# Altium PCB TestBoard.PcbDoc (part 1 of 3)
Units mm, origin at the board's own origin, x right, y up, seen from the top; angles counter-clockwise.
Board outline 300 x 186 mm, 4 copper layers (Top Layer, Mid-Layer 2, Mid-Layer 1, Bottom Layer); 136 components, 264 nets, 1109 pads, 450 vias.
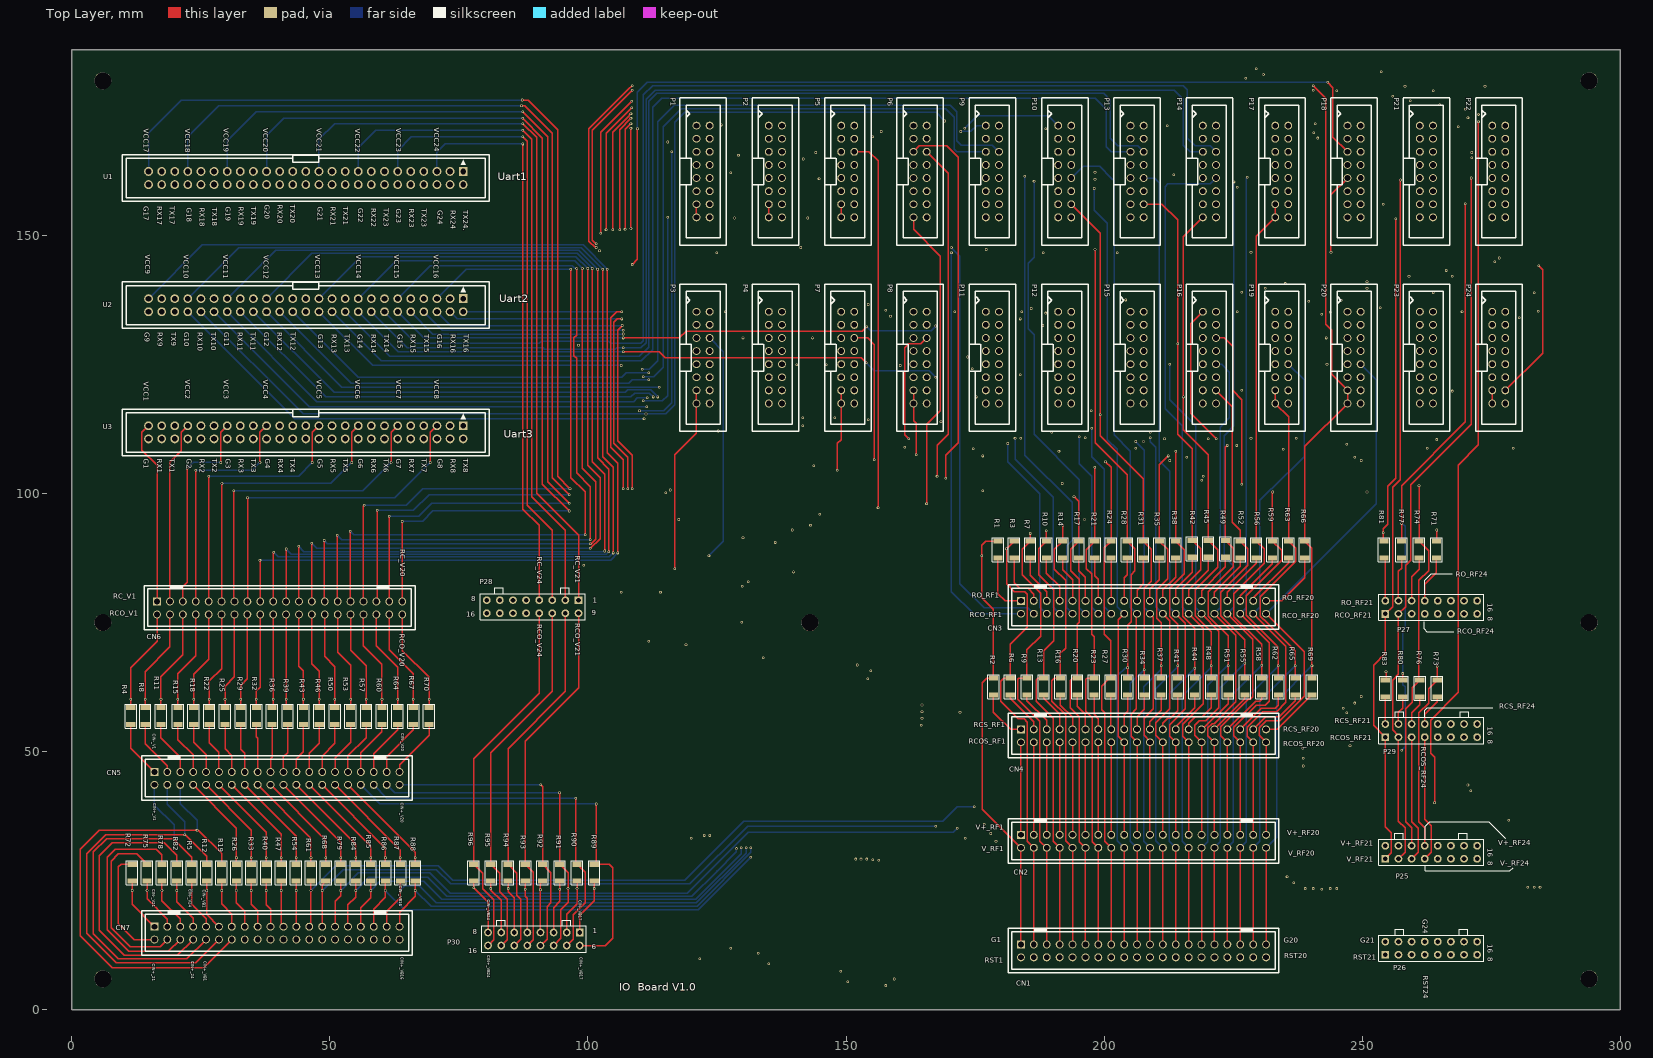
[diagram p0: Top Layer view]
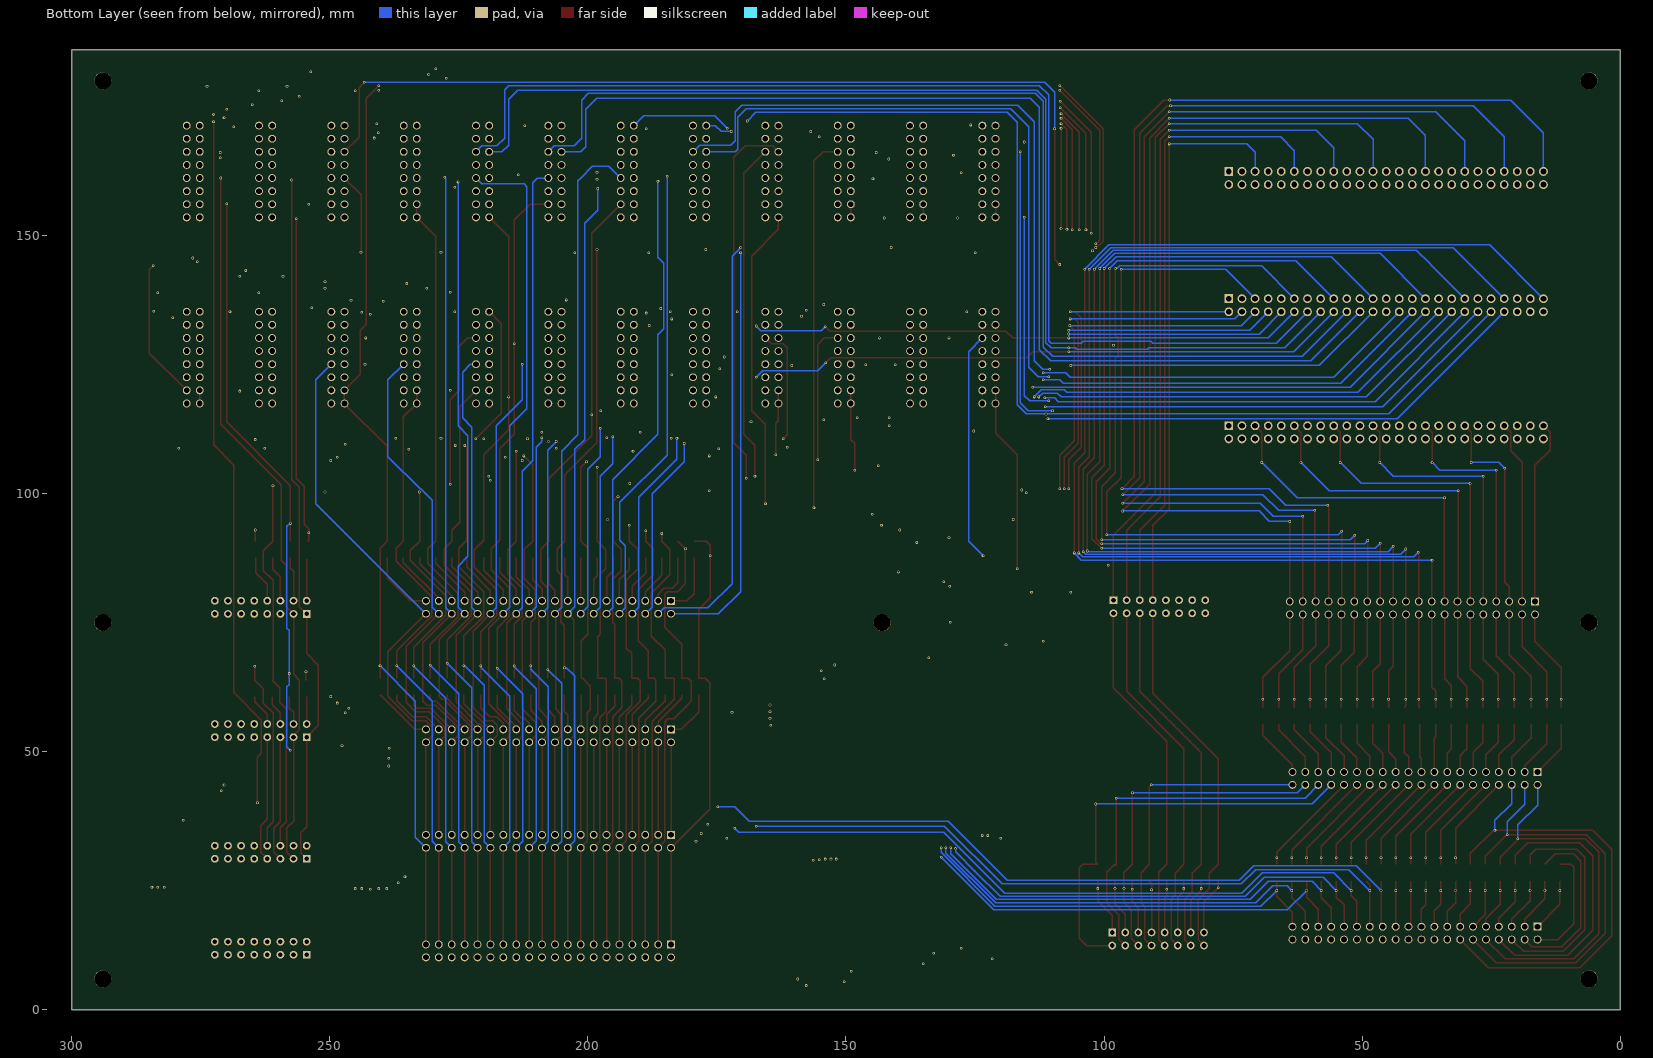
[diagram p1: Bottom Layer view, seen from below]
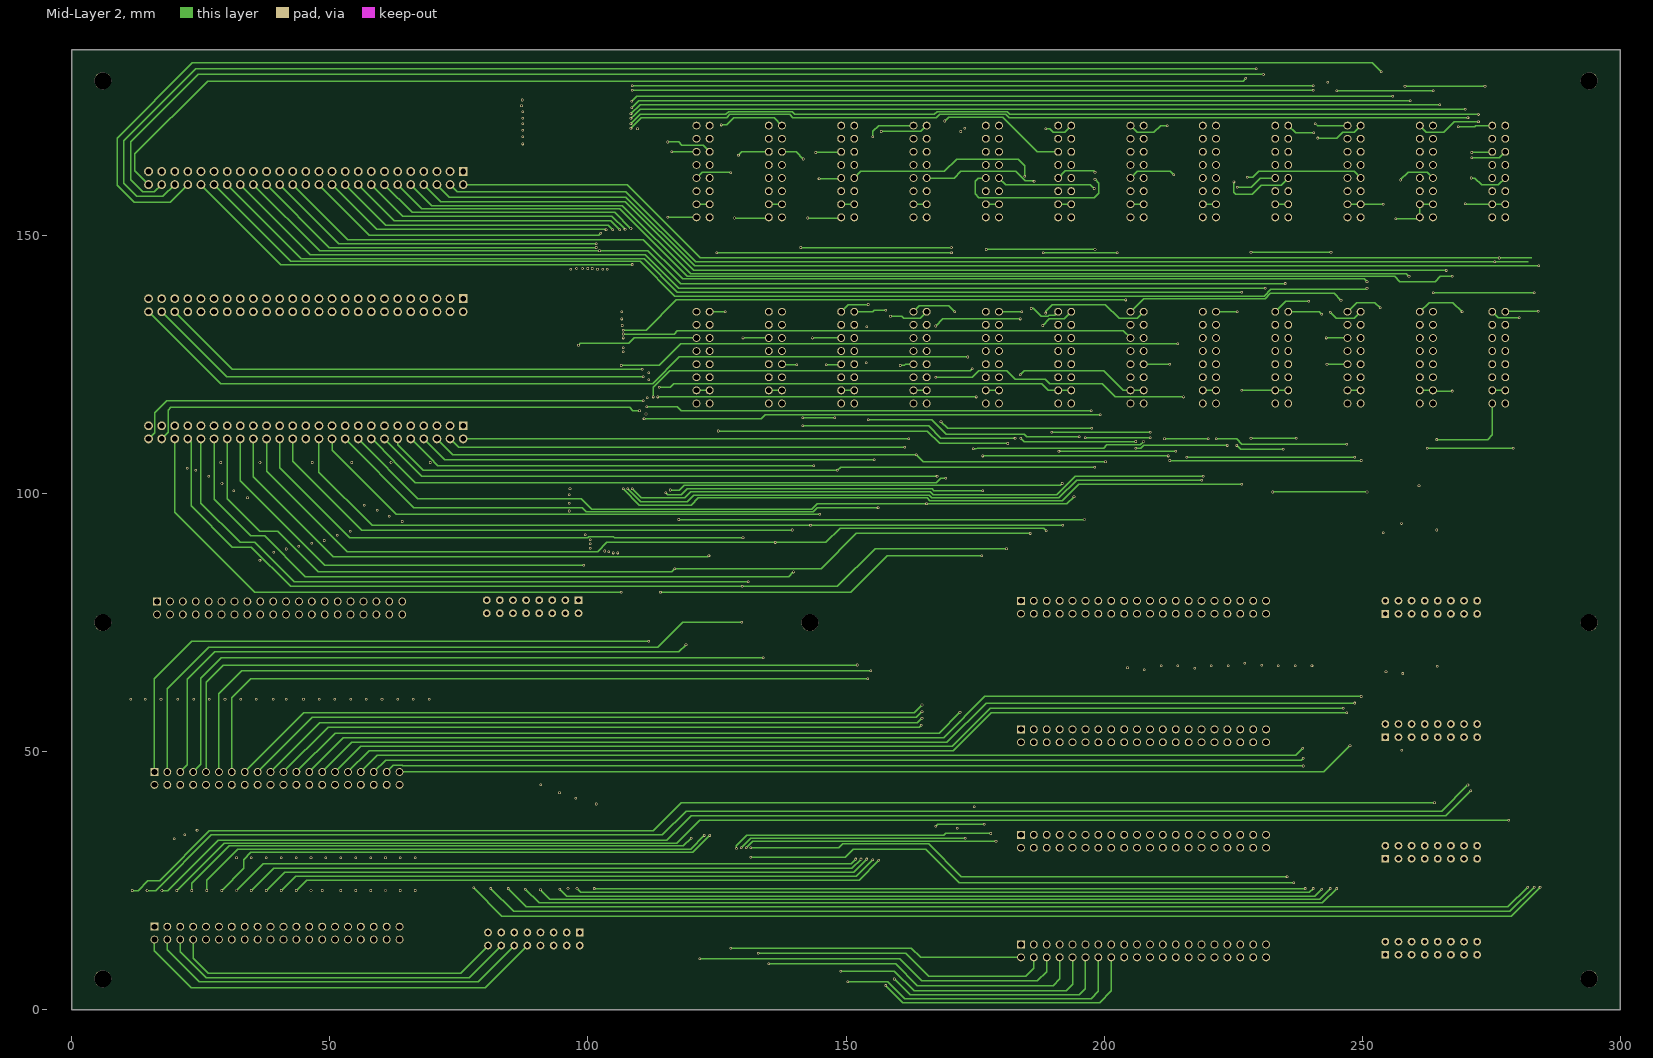
[diagram p2: Mid-Layer 2]
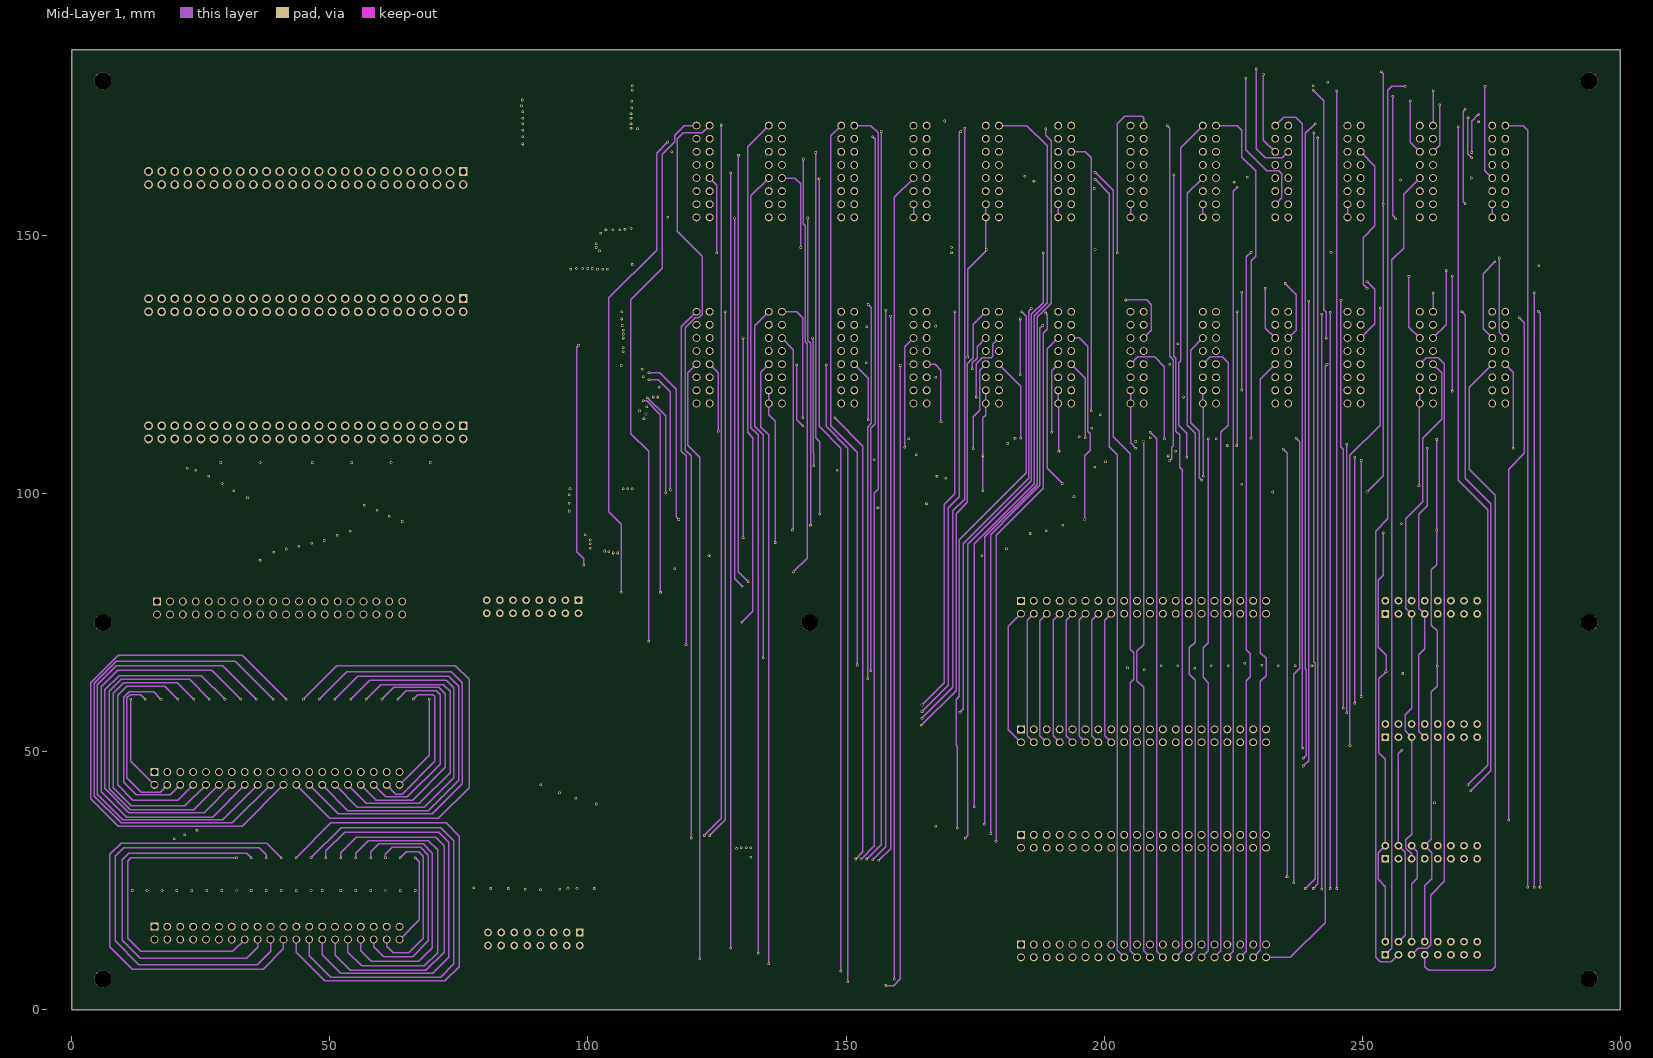
[diagram p3: Mid-Layer 1]

## Layer stack, top to bottom
Top Solder: solder mask 0.0102, Solder Resist, Dk 3.5
Top Layer: signal copper 0.0356
Dielectric1: core 0.32, FR-4, Dk 4.8
Mid-Layer 2: signal copper 0.0356
Dielectric3: prepreg 0.32, FR-4, Dk 4.8
Mid-Layer 1: signal copper 0.0356
Dielectric2: core 0.32, FR-4, Dk 4.8
Bottom Layer: signal copper 0.0356
Bottom Solder: solder mask 0.0102, Solder Resist, Dk 3.5

## Board outline
0,0 300,0 300,186 0,186

## Design rules (kind name [scope] priority, off if disabled: settings)
Clearance [All] p1: gap=0.254 ignorepadtopadclearanceinfootprint=FALSE except(0: Arc-Hole Track-Hole SMDPad-Hole THPad-Hole Via-Hole Fill-Hole Poly-Hole Region-Hole Text-Hole)
PolygonConnect [All] p1: connectstyle=Relief reliefconductorwidth=0.254 reliefentries=4 polygonreliefangle="90 Angle" airgapwidth=0.254
RoutingVias [All] p1: holewidth=0.711 width=1.27 viastyle="Through Hole" minholewidth=0.711 minwidth=1.27 maxholewidth=0.711 maxwidth=1.27
SilkToSolderMaskClearance SilkscreenOverComponentPads [IsPad] p1: minsilkscreentomaskgap=0.025 clearancetoexposedcopper=TRUE
SolderMaskExpansion [All] p1: expansion=0.102 istentingtop=FALSE
Width [All] p1: maxlimit=2.54 minlimit=0.203 preferedwidth=0.254
29 further rules are at their usual default settings.

## Components (designator, comment, footprint, x,y, rotation, side; value= is the part's Value field where it differs from the comment)
CN1 "XHY-40A" CONN-TH_XHY-40A 207.645,11.41 r180 top
CN2 "XHY-40A" CONN-TH_XHY-40A 207.645,32.639 r180 top
CN3 "XHY-40A" CONN-TH_XHY-40A 207.645,77.978 r180 top
CN4 "XHY-40A" CONN-TH_XHY-40A 207.645,53.079 r180 top
CN5 "XHY-40A" CONN-TH_XHY-40A 39.751,44.831 r180 top
CN6 "XHY-40A" CONN-TH_XHY-40A 40.259,77.851 r180 top
CN7 "XHY-40A" CONN-TH_XHY-40A 39.751,14.859 r180 top
P1 "KH-2.54PH180-2X8P-L8.9" IDC-TH_16P-P2.54_C3406 122.301,162.433 r270 top
P2 "KH-2.54PH180-2X8P-L8.9" IDC-TH_16P-P2.54_C3406 136.317,162.433 r270 top
P3 "KH-2.54PH180-2X8P-L8.9" IDC-TH_16P-P2.54_C3406 122.301,126.365 r270 top
P4 "KH-2.54PH180-2X8P-L8.9" IDC-TH_16P-P2.54_C3406 136.317,126.365 r270 top
P5 "KH-2.54PH180-2X8P-L8.9" IDC-TH_16P-P2.54_C3406 150.333,162.433 r270 top
P6 "KH-2.54PH180-2X8P-L8.9" IDC-TH_16P-P2.54_C3406 164.35,162.433 r270 top
P7 "KH-2.54PH180-2X8P-L8.9" IDC-TH_16P-P2.54_C3406 150.333,126.365 r270 top
P8 "KH-2.54PH180-2X8P-L8.9" IDC-TH_16P-P2.54_C3406 164.35,126.365 r270 top
P9 "KH-2.54PH180-2X8P-L8.9" IDC-TH_16P-P2.54_C3406 178.366,162.433 r270 top
P10 "KH-2.54PH180-2X8P-L8.9" IDC-TH_16P-P2.54_C3406 192.382,162.433 r270 top
P11 "KH-2.54PH180-2X8P-L8.9" IDC-TH_16P-P2.54_C3406 178.366,126.365 r270 top
P12 "KH-2.54PH180-2X8P-L8.9" IDC-TH_16P-P2.54_C3406 192.382,126.365 r270 top
P13 "KH-2.54PH180-2X8P-L8.9" IDC-TH_16P-P2.54_C3406 206.398,162.433 r270 top
P14 "KH-2.54PH180-2X8P-L8.9" IDC-TH_16P-P2.54_C3406 220.414,162.433 r270 top
P15 "KH-2.54PH180-2X8P-L8.9" IDC-TH_16P-P2.54_C3406 206.398,126.365 r270 top
P16 "KH-2.54PH180-2X8P-L8.9" IDC-TH_16P-P2.54_C3406 220.414,126.365 r270 top
P17 "KH-2.54PH180-2X8P-L8.9" IDC-TH_16P-P2.54_C3406 234.43,162.433 r270 top
P18 "KH-2.54PH180-2X8P-L8.9" IDC-TH_16P-P2.54_C3406 248.447,162.433 r270 top
P19 "KH-2.54PH180-2X8P-L8.9" IDC-TH_16P-P2.54_C3406 234.43,126.365 r270 top
P20 "KH-2.54PH180-2X8P-L8.9" IDC-TH_16P-P2.54_C3406 248.447,126.365 r270 top
P21 "KH-2.54PH180-2X8P-L8.9" IDC-TH_16P-P2.54_C3406 262.463,162.433 r270 top
P22 "KH-2.54PH180-2X8P-L8.9" IDC-TH_16P-P2.54_C3406 276.479,162.433 r270 top
P23 "KH-2.54PH180-2X8P-L8.9" IDC-TH_16P-P2.54_C3406 262.463,126.365 r270 top
P24 "KH-2.54PH180-2X8P-L8.9" IDC-TH_16P-P2.54_C3406 276.479,126.365 r270 top
P25 "Header 8X2A" HDR2X8_CEN 254.508,29.252 r0 top
P26 "Header 8X2A" HDR2X8_CEN 254.508,10.668 r0 top
P27 "Header 8X2A" HDR2X8_CEN 254.508,76.708 r0 top
P28 "Header 8X2A" HDR2X8_CEN 98.171,79.375 r180 top
P29 "Header 8X2A" HDR2X8_CEN 254.508,52.832 r0 top
P30 "Header 8X2A" HDR2X8_CEN 98.425,14.986 r180 top
R1 "30/1/4W" 1206R 179.451,90.805 r270 top
R2 "60/1/4W" 1206R 178.562,64.262 r270 top
R3 "30/1/4W" 1206R 182.579,90.805 r270 top
R4 "0.1/1/4W" 1206R 11.43,58.547 r270 top
R5 "0.1/1/4W" 1206R 23.234,28.194 r270 top
R6 "60/1/4W" 1206R 181.811,64.262 r270 top
R7 "30/1/4W" 1206R 185.707,90.805 r270 top
R8 "0.1/1/4W" 1206R 14.224,58.547 r270 top
R9 "60/1/4W" 1206R 185.059,64.262 r270 top
R10 "30/1/4W" 1206R 188.836,90.805 r270 top
R11 "0.1/1/4W" 1206R 17.272,58.547 r270 top
R12 "0.1/1/4W" 1206R 26.122,28.194 r270 top
R13 "60/1/4W" 1206R 188.308,64.262 r270 top
R14 "30/1/4W" 1206R 191.964,90.805 r270 top
R15 "0.1/1/4W" 1206R 20.554,58.547 r270 top
R16 "60/1/4W" 1206R 191.556,64.262 r270 top
R17 "30/1/4W" 1206R 195.092,90.805 r270 top
R18 "0.1/1/4W" 1206R 23.595,58.547 r270 top
R19 "0.1/1/4W" 1206R 29.009,28.194 r270 top
R20 "60/1/4W" 1206R 194.805,64.262 r270 top
R21 "30/1/4W" 1206R 198.22,90.805 r270 top
R22 "0.1/1/4W" 1206R 26.637,58.547 r270 top
R23 "60/1/4W" 1206R 198.053,64.262 r270 top
R24 "30/1/4W" 1206R 201.348,90.805 r270 top
R25 "0.1/1/4W" 1206R 29.678,58.547 r270 top
R26 "0.1/1/4W" 1206R 31.897,28.194 r270 top
R27 "60/1/4W" 1206R 201.302,64.262 r270 top
R28 "30/1/4W" 1206R 204.477,90.805 r270 top
R29 "0.1/1/4W" 1206R 32.719,58.547 r270 top
R30 "60/1/4W" 1206R 204.55,64.262 r270 top
R31 "30/1/4W" 1206R 207.605,90.805 r270 top
R32 "0.1/1/4W" 1206R 35.761,58.547 r270 top
R33 "0.1/1/4W" 1206R 34.785,28.194 r270 top
R34 "60/1/4W" 1206R 207.799,64.262 r270 top
R35 "30/1/4W" 1206R 210.733,90.805 r270 top
R36 "0.1/1/4W" 1206R 38.802,58.547 r270 top
R37 "60/1/4W" 1206R 211.047,64.262 r270 top
R38 "30/1/4W" 1206R 213.861,90.805 r270 top
R39 "0.1/1/4W" 1206R 41.843,58.547 r270 top
R40 "0.1/1/4W" 1206R 37.672,28.194 r270 top
R41 "60/1/4W" 1206R 214.296,64.262 r270 top
R42 "30/1/4W" 1206R 217.07,90.932 r270 top
R43 "0.1/1/4W" 1206R 44.884,58.547 r270 top
R44 "60/1/4W" 1206R 217.544,64.262 r270 top
R45 "30/1/4W" 1206R 220.198,90.932 r270 top
R46 "0.1/1/4W" 1206R 47.926,58.547 r270 top
R47 "0.1/1/4W" 1206R 40.56,28.194 r270 top
R48 "60/1/4W" 1206R 220.793,64.262 r270 top
R49 "30/1/4W" 1206R 223.52,90.932 r270 top
R50 "0.1/1/4W" 1206R 50.967,58.547 r270 top
R51 "60/1/4W" 1206R 224.041,64.262 r270 top
R52 "30/1/4W" 1206R 226.374,90.805 r270 top
R53 "0.1/1/4W" 1206R 54.008,58.547 r270 top
R54 "0.1/1/4W" 1206R 43.447,28.194 r270 top
R55 "60/1/4W" 1206R 227.29,64.262 r270 top
R56 "30/1/4W" 1206R 229.502,90.805 r270 top
R57 "0.1/1/4W" 1206R 57.05,58.547 r270 top
R58 "60/1/4W" 1206R 230.538,64.262 r270 top
R59 "30/1/4W" 1206R 232.631,90.805 r270 top
R60 "0.1/1/4W" 1206R 60.091,58.547 r270 top
R61 "0.1/1/4W" 1206R 46.335,28.194 r270 top
R62 "60/1/4W" 1206R 233.787,64.262 r270 top
R63 "30/1/4W" 1206R 235.759,90.805 r270 top
R64 "0.1/1/4W" 1206R 63.132,58.547 r270 top
R65 "60/1/4W" 1206R 237.035,64.262 r270 top
R66 "30/1/4W" 1206R 238.887,90.805 r270 top
R67 "0.1/1/4W" 1206R 66.174,58.547 r270 top
R68 "0.1/1/4W" 1206R 49.223,28.194 r270 top
R69 "60/1/4W" 1206R 240.284,64.262 r270 top
R70 "0.1/1/4W" 1206R 69.215,58.547 r270 top
R71 "30/1/4W" 1206R 264.414,90.805 r270 top
R72 "0.1/1/4W" 1206R 11.684,28.194 r270 top
R73 "60/1/4W" 1206R 264.541,63.881 r270 top
R74 "30/1/4W" 1206R 261.027,90.805 r270 top
R75 "0.1/1/4W" 1206R 14.572,28.194 r270 top
R76 "60/1/4W" 1206R 261.197,63.881 r270 top
R77 "30/1/4W" 1206R 257.641,90.805 r270 top
R78 "0.1/1/4W" 1206R 17.459,28.194 r270 top
R79 "0.1/1/4W" 1206R 52.11,28.194 r270 top
R80 "60/1/4W" 1206R 257.852,63.881 r270 top
R81 "30/1/4W" 1206R 254.254,90.805 r270 top
R82 "0.1/1/4W" 1206R 20.347,28.194 r270 top
R83 "60/1/4W" 1206R 254.508,63.881 r270 top
R84 "0.1/1/4W" 1206R 54.998,28.194 r270 top
R85 "0.1/1/4W" 1206R 57.885,28.194 r270 top
R86 "0.1/1/4W" 1206R 60.773,28.194 r270 top
R87 "0.1/1/4W" 1206R 63.66,28.194 r270 top
R88 "0.1/1/4W" 1206R 66.548,28.194 r270 top
R89 "0.1/1/4W" 1206R 101.219,28.194 r270 top
R90 "0.1/1/4W" 1206R 97.881,28.194 r270 top
R91 "0.1/1/4W" 1206R 94.542,28.194 r270 top
R92 "0.1/1/4W" 1206R 91.204,28.194 r270 top
R93 "0.1/1/4W" 1206R 87.866,28.194 r270 top
R94 "0.1/1/4W" 1206R 84.528,28.194 r270 top
R95 "0.1/1/4W" 1206R 81.189,28.194 r270 top
R96 "0.1/1/4W" 1206R 77.851,28.194 r270 top
U1 "XDFH-0254-2*25P" CONN-TH_50P-P2.54_LX_XDFH-0254-2X25P 45.339,161.163 r180 top
U2 "XDFH-0254-2*25P" CONN-TH_50P-P2.54_LX_XDFH-0254-2X25P 45.339,136.525 r180 top
U3 "XDFH-0254-2*25P" CONN-TH_50P-P2.54_LX_XDFH-0254-2X25P 45.339,111.887 r180 top

## Footprints (in the part's own frame and the unit in brackets; to place one, negate y for a bottom-side part, rotate by r counter-clockwise, add the part's x,y. Pads: shape width x height; smd on the part's side, far side on the other; paste and mask are expansions set on the pad)
1206R [mm]
  rect 1x1.8 smd: 1(0,0) 2(3.25,0)
  silkscreen extent -0.7,-1.1 3.95,1.1
CONN-TH_50P-P2.54_LX_XDFH-0254-2X25P [mm]
  rect 1.7x1.7 hole 1.1 paste+0.051: 1(-30.48,-1.27)
  round 1.7 hole 1.1 paste+0.051: 2(-30.48,1.27) 3(-27.94,-1.27) 4(-27.94,1.27) 5(-25.4,-1.27) 6(-25.4,1.27) 7(-22.86,-1.27) 8(-22.86,1.27) 9(-20.32,-1.27) 10(-20.32,1.27) 11(-17.78,-1.27) 12(-17.78,1.27) 13(-15.24,-1.27) 14(-15.24,1.27) 15(-12.7,-1.27) 16(-12.7,1.27) 17(-10.16,-1.27) 18(-10.16,1.27) 19(-7.62,-1.27) 20(-7.62,1.27) 21(-5.08,-1.27) 22(-5.08,1.27) 23(-2.54,-1.27) 24(-2.54,1.27) 25(0,-1.27) 26(0,1.27) 27(2.54,-1.27) 28(2.54,1.27) 29(5.08,-1.27) 30(5.08,1.27) 31(7.62,-1.27) 32(7.62,1.27) 33(10.16,-1.27) 34(10.16,1.27) 35(12.7,-1.27) 36(12.7,1.27) 37(15.24,-1.27) 38(15.24,1.27) 39(17.78,-1.27) 40(17.78,1.27) 41(20.32,-1.27) 42(20.32,1.27) 43(22.86,-1.27) 44(22.86,1.27) 45(25.4,-1.27) 46(25.4,1.27) 47(27.94,-1.27) 48(27.94,1.27) 49(30.48,-1.27) 50(30.48,1.27)
  silkscreen extent -35.55,-4.5 35.55,4.5
CONN-TH_XHY-40A [mil]
  rect 60x60 hole 43.31 paste+2: 1(935.04,-49.21)
  round 60 hole 43.31 paste+2: 2(935.04,49.21) 3(836.61,-49.21) 4(836.61,49.21) 5(738.19,-49.21) 6(738.19,49.21) 7(639.76,-49.21) 8(639.76,49.21) 9(541.34,-49.21) 10(541.34,49.21) 11(442.91,-49.21) 12(442.91,49.21) 13(344.49,-49.21) 14(344.49,49.21) 15(246.06,-49.21) 16(246.06,49.21) 17(147.64,-49.21) 18(147.64,49.21) 19(49.21,-49.21) 20(49.21,49.21) 21(-49.21,-49.21) 22(-49.21,49.21) 23(-147.64,-49.21) 24(-147.64,49.21) 25(-246.06,-49.21) 26(-246.06,49.21) 27(-344.49,-49.21) 28(-344.49,49.21) 29(-442.91,-49.21) 30(-442.91,49.21) 31(-541.34,-49.21) 32(-541.34,49.21) 33(-639.76,-49.21) 34(-639.76,49.21) 35(-738.19,-49.21) 36(-738.19,49.21) 37(-836.61,-49.21) 38(-836.61,49.21) 39(-935.04,-49.21) 40(-935.04,49.21)
  silkscreen extent -1033,-171 1033,167
HDR2X8_CEN [mm] "Connector; Header; 8x2 Position"
  rect 1.5x1.5 hole 0.9: 1(0,0)
  round 1.5 hole 0.9: 2(2.54,0) 3(5.08,0) 4(7.62,0) 5(10.16,0) 6(12.7,0) 7(15.24,0) 8(17.78,0) 9(0,2.54) 10(2.54,2.54) 11(5.08,2.54) 12(7.62,2.54) 13(10.16,2.54) 14(12.7,2.54) 15(15.24,2.54) 16(17.78,2.54)
  silkscreen extent -1.27,-1.27 19.05,3.81
IDC-TH_16P-P2.54_C3406 [mil]
  round 60 hole 43.3 paste+2: 1(-350,-50) 2(-350,50) 3(-250,-50) 4(-250,50) 5(-150,-50) 6(-150,50) 7(-50,-50) 8(-50,50) 9(50,-50) 10(50,50) 11(150,-50) 12(150,50) 13(250,-50) 14(250,50) 15(350,-50) 16(350,50)
  silkscreen extent -561,-177 563,178

## Part data
P1 P2 P3 P4 P5 P6 P7 P8 P9 P10 P11 P12 P13 P14 P15 P16 P17 P18 P19 P20 P21 P22 P23 P24: library part HDR-IDC-2.54-2X8P
P25 P26 P27 P28 P29 P30: "Header, 8-Pin, Dual row"
R1 R2 R3 R4 R5 R6 R7 R8 R9 R10 R11 R12 R13 R14 R15 R16 R17 R18 R19 R20 R21 R22 R23 R24 R25 R26 R27 R28 R29 R30 R31 R32 R33 R34 R35 R36 R37 R38 R39 R40 R41 R42 R43 R44 R45 R46 R47 R48 R49 R50 R51 R52 R53 R54 R55 R56 R57 R58 R59 R60 R61 R62 R63 R64 R65 R66 R67 R68 R69 R70 R71 R72 R73 R74 R75 R76 R77 R78 R79 R80 R81 R82 R83 R84 R85 R86 R87 R88 R89 R90 R91 R92 R93 R94 R95 R96: library part Res1, "Resistor"
U1 U2 U3: library part "XDFH-0254- 2*25P"

## Free pads (board coordinates)
  round 3.3 hole 3.3: 1(6,6) 1(6,75) 1(6,180) 1(143,75) 1(294,6) 1(294,75) 1(294,180)

## Via types
v1: diameter 0.508, hole 0.305, Top Layer to Bottom Layer, tented both sides, 450 vias

## Nets (pads, with @x,y where several pads share a name; then routed paths per layer and width w, separated by ;. In a path a pad name is that pad's centre, name@x,y a point inside that pad or via, vN(x,y) a via of type N, cw(c..) or ccw(c..) an arc to the next point about the centre after c; other vN are vias at no path point)
CIN_1: CN5.2 CN6.2 CN7.10 R4.1 R5.1 | length 114.8
  Top Layer w0.254: R4.1@11.43,58.547 v1(11.43,60.198) 11.43,66.294 16.509,71.373 CN6.2@16.509,76.601 ; v1@19.685,33.147 6.731,33.147 4.191,30.607 4.191,14.732 9.017,9.906 22.298,9.906 CN7.10@26.001,13.609 ; v1@19.748,33.084 23.234,29.598 R5.1@23.234,28.194
  Mid-Layer 1 w0.254: v1(11.43,60.198) 11.43,48.152 CN5.2@16.001,43.581
  Bottom Layer w0.254: CN5.2@16.001,43.581 16.001,39.625 19.812,35.814 v1(19.812,33.147)
CIN_2: CN5.4 CN6.4 CN7.12 R8.1 R12.1 | length 133.4
  Top Layer w0.254: R8.1@14.224,58.547 v1(14.224,60.198) 14.224,65.532 19.009,70.317 CN6.4@19.009,76.601 ; v1(21.844,33.909) 6.604,33.909 2.921,30.226 2.921,14.859 8.636,9.144 24.036,9.144 CN7.12@28.501,13.609 ; v1@21.971,33.909 26.122,29.758 R12.1@26.122,28.194
  Mid-Layer 1 w0.254: v1(14.224,60.198) 13.335,61.087 11.303,61.087 10.668,60.452 10.668,44.958 13.462,42.164 17.084,42.164 CN5.4@18.501,43.581
  Bottom Layer w0.254: CN5.4@18.501,43.581 18.501,39.792 21.844,36.449 v1(21.844,33.909)
CIN_3: CN5.6 CN6.6 CN7.14 R11.1 R19.1 | length 152.1
  Top Layer w0.254: R11.1@17.272,58.547 v1(17.272,60.198) 17.272,64.516 21.509,68.753 21.509,71.501 ; 21.509,70.404 21.509,71.501 ; CN6.6@21.509,76.601 21.509,71.501 ; v1(24.257,34.798) 5.334,34.798 1.651,31.115 1.651,14.351 7.874,8.128 25.52,8.128 CN7.14@31.001,13.609 ; 24.511,34.798 29.009,30.3 R19.1@29.009,28.194
  Mid-Layer 1 w0.254: v1(17.272,60.198) 15.875,61.595 11.093,61.595 10.033,60.535 10.033,44.069 12.446,41.656 19.076,41.656 CN5.6@21.001,43.581
  Bottom Layer w0.254: CN5.6@21.001,43.581 21.001,39.959 24.257,36.703 v1(24.257,34.798)
CIN_4: CN5.8 CN6.8 CN7.16 R15.1 R26.1 | length 147.3
  Top Layer w0.254: R15.1@20.554,58.547 v1(20.554,60.198) 20.554,65.131 24.009,68.586 CN6.8@24.009,76.601 ; CN5.8@23.501,43.581 31.897,35.185 v1(31.897,29.464) R26.1@31.897,28.194
  Mid-Layer 1 w0.254: v1(20.554,60.198) 18.014,62.738 10.668,62.738 8.89,60.96 8.89,43.561 11.811,40.64 20.56,40.64 CN5.8@23.501,43.581 ; v1(31.897,29.464) 11.43,29.464 10.795,28.829 10.795,13.843 13.335,11.303 31.195,11.303 CN7.16@33.501,13.609
CIN_5: CN5.10 CN6.10 CN7.18 R18.1 R33.1 | length 167
  Top Layer w0.254: R18.1@23.595,58.547 v1(23.595,60.198) 23.595,64.997 26.509,67.911 CN6.10@26.509,76.601 ; CN5.10@26.001,43.581 34.785,34.797 v1(34.785,29.464) R33.1@34.785,28.194
  Mid-Layer 1 w0.254: v1(23.595,60.198) 20.42,63.373 10.033,63.373 8.001,61.341 8.001,43.053 11.557,39.497 21.917,39.497 CN5.10@26.001,43.581 ; v1(34.785,29.464) 33.896,30.353 11.049,30.353 9.779,29.083 9.779,13.462 13.208,10.033 33.909,10.033 36.001,12.125 CN7.18@36.001,13.609
CIN_6: CN5.12 CN6.12 CN7.20 R22.1 R40.1 | length 186.9
  Top Layer w0.254: R22.1@26.637,58.547 v1(26.637,60.198) 26.637,63.721 29.009,66.093 CN6.12@29.009,76.601 ; CN5.12@28.501,43.581 37.672,34.41 v1(37.672,29.464) R40.1@37.672,28.194
  Mid-Layer 1 w0.254: v1(26.637,60.198) 22.827,64.008 9.525,64.008 7.239,61.722 7.239,42.799 11.303,38.735 23.655,38.735 CN5.12@28.501,43.581 ; v1(37.672,29.464) 37.672,30.019 36.322,31.369 10.033,31.369 8.382,29.718 8.382,13.335 12.954,8.763 35.941,8.763 38.501,11.323 CN7.20@38.501,13.609
CIN_7: CN5.14 CN6.14 CN7.22 R25.1 R47.1 | length 204.4
  Top Layer w0.254: R25.1@29.678,58.547 v1(29.678,60.198) 29.678,62.698 31.509,64.529 CN6.14@31.509,76.601 ; CN5.14@31.001,43.581 40.56,34.022 v1(40.56,29.464) R47.1@40.56,28.194
  Mid-Layer 1 w0.254: v1(29.678,60.198) 25.106,64.77 9.144,64.77 6.35,61.976 6.35,42.926 11.049,38.227 25.647,38.227 CN5.14@31.001,43.581 ; v1(40.56,29.464) 37.766,32.258 9.525,32.258 7.366,30.099 7.366,12.192 11.684,7.874 37.064,7.874 41.001,11.811 CN7.22@41.001,13.609
CIN_8: CN5.16 CN6.16 CN7.24 R29.1 R54.1 | length 219.7
  Top Layer w0.254: R29.1@32.719,58.547 v1(32.719,60.198) 32.719,62.818 34.009,64.108 CN6.16@34.009,76.601 ; CN5.16@33.501,43.581 43.447,33.635 v1(43.447,29.464) R54.1@43.447,28.194
  Mid-Layer 1 w0.254: v1(32.719,60.198) 27.131,65.786 8.89,65.786 5.715,62.611 5.715,42.291 10.668,37.338 27.258,37.338 CN5.16@33.501,43.581 ; v1(43.447,29.464) 50.178,36.195 72.517,36.195 75.057,33.655 75.057,8.382 72.263,5.588 49.022,5.588 43.501,11.109 CN7.24@43.501,13.609
CIN_9: CN5.18 CN6.18 CN7.26 R32.1 R61.1 | length 219.1
  Top Layer w0.254: R32.1@35.761,58.547 v1(35.761,60.198) 35.761,61.796 36.509,62.544 CN6.18@36.509,76.601 ; CN5.18@36.001,43.581 46.335,33.247 v1(46.335,29.464) R61.1@46.335,28.194
  Mid-Layer 1 w0.254: v1(35.761,60.198) 29.284,66.675 8.636,66.675 4.953,62.992 4.953,41.783 9.906,36.83 29.25,36.83 CN5.18@36.001,43.581 ; CN7.26@46.001,13.609 46.001,10.514 50.165,6.35 71.501,6.35 74.041,8.89 74.041,32.766 71.501,35.306 52.177,35.306 v1(46.335,29.464)
CIN_10: CN5.20 CN6.20 CN7.28 R36.1 R68.1 | length 218.7
  Top Layer w0.254: CN5.20@38.501,43.581 49.223,32.86 v1(49.223,29.464) R68.1@49.223,28.194 ; R36.1@38.802,58.547 39.009,58.754 v1(39.009,60.198) CN6.20@39.009,76.601
  Mid-Layer 1 w0.254: CN5.20@38.501,43.581 31.115,36.195 9.525,36.195 4.318,41.402 4.318,63.246 8.636,67.564 31.643,67.564 v1(39.009,60.198) ; CN7.28@48.501,13.609 48.501,10.681 52.07,7.112 69.977,7.112 73.025,10.16 73.025,32.512 71.12,34.417 52.832,34.417 49.223,30.808 v1(49.223,29.464)
CIN_11: CN5.22 CN6.22 CN7.30 R39.1 R79.1 | length 217.4
  Top Layer w0.254: CN5.22@41.001,43.581 52.11,32.472 v1(52.11,29.464) R79.1@52.11,28.194 ; CN6.22@41.509,76.601 v1(41.509,60.198) 41.509,58.881 R39.1@41.843,58.547
  Mid-Layer 1 w0.254: CN5.22@41.001,43.581 32.98,35.56 9.017,35.56 3.683,40.894 3.683,63.373 9.017,68.707 33,68.707 v1(41.509,60.198) ; CN7.30@51.001,13.609 51.001,10.594 53.975,7.62 68.58,7.62 72.136,11.176 72.136,31.75 70.485,33.401 55.118,33.401 52.11,30.393 v1(52.11,29.464)
CIN_12: CN5.24 CN6.24 CN7.32 R43.1 R84.1 | length 194.4
  Top Layer w0.254: CN5.24@43.501,43.581 54.998,32.084 v1(54.998,29.464) R84.1@54.998,28.194 ; CN6.24@44.009,76.601 44.009,66.608 44.884,65.733 v1(44.884,60.198) R43.1@44.884,58.547
  Mid-Layer 1 w0.254: CN5.24@43.501,43.581 49.998,37.084 70.993,37.084 76.962,43.053 76.962,64.008 74.295,66.675 51.361,66.675 v1(44.884,60.198) ; CN7.32@53.501,13.609 53.501,11.142 56.134,8.509 68.326,8.509 70.866,11.049 70.866,30.988 69.088,32.766 57.404,32.766 54.998,30.36 v1(54.998,29.464)
CIN_13: CN5.26 CN6.26 CN7.34 R46.1 R85.1 | length 174.5
  Top Layer w0.254: CN5.26@46.001,43.581 57.885,31.697 v1(57.885,29.464) R85.1@57.885,28.194 ; CN6.26@46.509,76.601 46.509,67.029 47.926,65.612 v1(47.926,60.198) R46.1@47.926,58.547
  Mid-Layer 1 w0.254: CN5.26@46.001,43.581 51.609,37.973 69.85,37.973 75.692,43.815 75.692,63.373 73.533,65.532 53.26,65.532 v1(47.926,60.198) ; CN7.34@56.001,13.609 56.001,11.436 58.039,9.398 67.183,9.398 69.85,12.065 69.85,30.353 68.072,32.131 59.436,32.131 57.885,30.58 v1(57.885,29.464)
CIN_14: CN5.28 CN6.28 CN7.36 R50.1 R86.1 | length 156
  Top Layer w0.254: CN5.28@48.501,43.581 60.773,31.309 v1(60.773,29.464) R86.1@60.773,28.194 ; CN6.28@49.009,76.601 49.009,68.466 50.967,66.508 v1(50.967,60.198) R50.1@50.967,58.547
  Mid-Layer 1 w0.254: CN5.28@48.501,43.581 53.474,38.608 69.088,38.608 74.93,44.45 74.93,62.738 73.025,64.643 55.412,64.643 v1(50.967,60.198) ; CN7.36@58.501,13.609 58.501,12.238 60.452,10.287 66.04,10.287 69.088,13.335 69.088,29.972 67.564,31.496 62.103,31.496 60.773,30.166 v1(60.773,29.464)
CIN_15: CN5.30 CN6.30 CN7.38 R53.1 R87.1 | length 137.7
  Top Layer w0.254: CN5.30@51.001,43.581 63.66,30.922 v1(63.66,29.464) R87.1@63.66,28.194 ; CN6.30@51.509,76.601 51.509,69.268 54.008,66.769 v1(54.008,60.198) R53.1@54.008,58.547
  Mid-Layer 1 w0.254: CN5.30@51.001,43.581 55.339,39.243 68.326,39.243 74.041,44.958 74.041,62.357 72.517,63.881 57.691,63.881 v1(54.008,60.198) ; CN7.38@61.001,13.609 61.001,12.278 62.23,11.049 65.278,11.049 68.072,13.843 68.072,29.718 67.183,30.607 64.803,30.607 v1(63.66,29.464)
CIN_16: CN5.32 CN6.32 CN7.40 R57.1 R88.1 | length 115.2
  Top Layer w0.254: CN5.32@53.501,43.581 66.548,30.534 v1(66.548,29.464) R88.1@66.548,28.194 ; CN6.32@54.009,76.601 54.009,69.689 57.05,66.648 v1(57.05,60.198) R57.1@57.05,58.547
  Mid-Layer 1 w0.254: CN5.32@53.501,43.581 57.077,40.005 67.31,40.005 73.279,45.974 73.279,61.722 72.009,62.992 59.844,62.992 v1(57.05,60.198) ; CN7.40@63.501,13.609 67.31,17.418 67.31,28.702 v1(66.548,29.464)
CIN_17: CN5.34 CN6.34 P30.9 R60.1 R89.1 | length 151.2
  Top Layer w0.254: CN6.34@56.509,76.601 56.509,70.491 60.091,66.909 v1(60.091,60.198) R60.1@60.091,58.547 ; P30.9@98.425,12.446 103.378,12.446 104.775,13.843 104.775,27.559 104.14,28.194 R89.1@101.219,28.194 101.6,28.575 v1(101.6,39.878)
  Mid-Layer 1 w0.254: CN5.34@56.001,43.581 58.942,40.64 66.04,40.64 72.39,46.99 72.39,61.214 71.12,62.484 62.377,62.484 v1(60.091,60.198)
  Bottom Layer w0.254: CN5.34@56.001,43.581 59.704,39.878 v1(101.6,39.878)
CIN_18: CN5.36 CN6.36 P30.10 R64.1 R90.1 | length 130.5
  Top Layer w0.254: CN6.36@59.009,76.601 59.009,70.531 63.132,66.408 v1(63.132,60.198) R64.1@63.132,58.547 ; P30.10@95.885,12.446 97.155,13.716 97.155,18.415 99.441,20.701 99.441,26.634 R90.1@97.881,28.194 97.881,27.904 97.663,28.121 v1(97.663,41.021)
  Mid-Layer 1 w0.254: CN5.36@58.501,43.581 60.807,41.275 65.024,41.275 71.374,47.625 71.374,61.087 70.612,61.849 64.783,61.849 v1(63.132,60.198)
  Bottom Layer w0.254: CN5.36@58.501,43.581 61.061,41.021 v1(97.663,41.021)
CIN_19: CN5.38 CN6.38 P30.11 R67.1 R91.1 | length 115.6
  Top Layer w0.254: CN6.38@61.509,76.601 61.509,69.809 66.174,65.144 v1(66.174,60.198) R67.1@66.174,58.547 ; P30.11@93.345,12.446 94.742,13.843 94.742,19.431 96.139,20.828 96.139,26.597 R91.1@94.542,28.194 94.488,28.248 v1(94.488,42.037)
  Mid-Layer 1 w0.254: CN5.38@61.001,43.581 62.799,41.783 64.008,41.783 70.358,48.133 70.358,60.706 69.977,61.087 67.063,61.087 v1(66.174,60.198)
  Bottom Layer w0.254: CN5.38@61.001,43.581 62.545,42.037 v1(94.488,42.037)
  other v1: 96.139,23.495
CIN_20: CN5.40 CN6.40 P30.12 R70.1 R92.1 | length 99.3
  Top Layer w0.254: CN6.40@64.009,76.601 64.009,69.595 69.215,64.389 v1(69.215,60.198) R70.1@69.215,58.547 ; P30.12@90.805,12.446 92.075,13.716 92.075,19.939 92.837,20.701 92.837,26.561 R92.1@91.204,28.194 91.204,43.202 v1(90.825,43.581)
  Mid-Layer 1 w0.254: CN5.40@63.501,43.581 69.215,49.295 v1(69.215,60.198)
  Bottom Layer w0.254: CN5.40@63.501,43.581 v1(90.825,43.581)
CIN_21: CN7.2 P28.9 P30.13 R72.1 R93.1 | length 172.7
  Top Layer w0.254: R72.1@11.684,28.194 9.525,28.194 9.017,27.686 9.017,16.637 12.045,13.609 CN7.2@16.001,13.609 ; P30.13@88.265,12.446 89.408,13.589 89.408,26.652 R93.1@87.866,28.194 87.866,52.052 98.171,62.357 P28.9@98.171,76.835
  Mid-Layer 2 w0.254: CN7.2@16.001,13.609 16.001,11.431 23.114,4.318 80.137,4.318 P30.13@88.265,12.446
CIN_22: CN7.4 P28.10 P30.14 R75.1 R94.1 | length 179.5
  Top Layer w0.254: R75.1@14.572,28.194 12.54,30.226 9.017,30.226 7.62,28.829 7.62,15.875 11.303,12.192 17.084,12.192 CN7.4@18.501,13.609 ; P30.14@85.725,12.446 86.995,13.716 86.995,21.463 86.233,22.225 86.233,26.489 R94.1@84.528,28.194 84.528,50.619 95.631,61.722 P28.10@95.631,76.835
  Mid-Layer 2 w0.254: CN7.4@18.501,13.609 18.501,11.598 24.638,5.461 78.74,5.461 P30.14@85.725,12.446
CIN_23: CN7.6 P28.11 P30.15 R78.1 R95.1 | length 184.7
  Top Layer w0.254: R78.1@17.459,28.194 17.459,30.039 16.383,31.115 8.382,31.115 6.858,29.591 6.858,15.621 6.858,15.494 11.049,11.303 18.695,11.303 CN7.6@21.001,13.609 ; P30.15@83.185,12.446 84.328,13.589 84.328,21.463 82.931,22.86 82.931,26.452 R95.1@81.189,28.194 81.189,49.82 93.091,61.722 P28.11@93.091,76.835
  Mid-Layer 2 w0.254: CN7.6@21.001,13.609 21.001,11.257 26.035,6.223 76.962,6.223 P30.15@83.185,12.446
CIN_24: CN7.8 P28.12 P30.16 R82.1 R96.1 | length 190.6
  Top Layer w0.254: R82.1@20.347,28.194 20.347,29.945 17.907,32.385 7.874,32.385 5.334,29.845 5.334,15.367 10.16,10.541 20.433,10.541 CN7.8@23.501,13.609 ; P30.16@80.645,12.446 81.788,13.589 81.788,21.336 79.629,23.495 79.629,26.416 R96.1@77.851,28.194 77.851,48.641 90.551,61.341 P28.12@90.551,76.835
  Mid-Layer 2 w0.254: CN7.8@23.501,13.609 23.501,10.027 26.416,7.112 75.311,7.112 P30.16@80.645,12.446
"DCIN_3.3V _RF1": CN5.1 P1.1 R4.2 | length 235.9
  Top Layer w0.254: R4.2@11.43,55.297 11.43,50.652 CN5.1@16.001,46.081
  Mid-Layer 1 w0.254: v1(111.76,71.374) 111.76,108.204 108.331,111.633 108.331,137.541 114.427,143.637 114.427,165.735 116.84,168.148 116.84,169.469 118.694,171.323 P1.1@121.031,171.323
  Mid-Layer 2 w0.254: CN5.1@16.001,46.081 16.001,64.134 23.241,71.374 v1(111.76,71.374)
"DCIN_3.3V _RF2": CN5.3 P2.1 R8.2 | length 243
  Top Layer w0.254: R8.2@14.224,55.297 14.224,51.562 18.501,47.285 CN5.3@18.501,46.081
  Mid-Layer 1 w0.254: v1(129.794,75.057) 131.953,77.216 131.953,110.871 130.937,111.887 130.937,167.213 P2.1@135.047,171.323
  Mid-Layer 2 w0.254: CN5.3@18.501,46.081 18.501,62.189 26.543,70.231 113.538,70.231 118.364,75.057 v1(129.794,75.057)
"DCIN_3.3V _RF3": CN5.5 P3.1 R11.2 | length 194.8
  Top Layer w0.254: R11.2@17.272,55.297 17.272,52.705 21.001,48.976 CN5.5@21.001,46.081
  Mid-Layer 1 w0.254: v1(118.999,70.739) 118.999,107.315 118.11,108.204 118.11,132.334 P3.1@121.031,135.255
  Mid-Layer 2 w0.254: CN5.5@21.001,46.081 22.352,47.432 22.352,64.008 27.686,69.342 117.602,69.342 v1(118.999,70.739)
"DCIN_3.3V _RF4": CN5.7 P4.1 R15.2 | length 208.7
  Top Layer w0.254: R15.2@20.554,55.297 20.554,52.344 23.501,49.397 CN5.7@23.501,46.081
  Mid-Layer 1 w0.254: v1(133.985,68.199) 133.985,111.379 132.334,113.03 132.334,132.542 P4.1@135.047,135.255
  Mid-Layer 2 w0.254: CN5.7@23.501,46.081 25.019,47.599 25.019,64.262 28.956,68.199 v1(133.985,68.199)
"DCIN_3.3V _RF5": CN5.9 P5.1 R18.2 | length 263.1
  Top Layer w0.254: R18.2@23.595,55.297 23.595,51.843 26.001,49.437 CN5.9@26.001,46.081
  Mid-Layer 1 w0.254: 147.066,157.099 147.066,156.591 ; P5.1@149.063,171.323 147.066,169.326 147.066,156.591 ; v1(152.146,66.802) 152.146,108.077 147.066,113.157 147.066,156.591
  Mid-Layer 2 w0.254: CN5.9@26.001,46.081 26.001,63.466 29.337,66.802 v1(152.146,66.802)
"DCIN_3.3V _RF6": CN5.11 P6.1 R22.2 | length 266.8
  Top Layer w0.254: R22.2@26.637,55.297 26.637,51.722 28.501,49.858 CN5.11@28.501,46.081
  Mid-Layer 1 w0.254: v1(154.813,65.659) 154.813,95.377 154.813,112.649 155.702,113.538 155.702,168.656 v1(155.194,169.164)
  Mid-Layer 2 w0.254: CN5.11@28.501,46.081 28.501,61.267 32.893,65.659 v1(154.813,65.659) ; v1(155.194,169.164) 155.194,170.18 156.337,171.323 P6.1@163.08,171.323
"DCIN_3.3V _RF7": CN5.13 P7.1 R25.2 | length 227.8
  Top Layer w0.254: R25.2@29.678,55.297 29.678,50.586 31.001,49.263 CN5.13@31.001,46.081
  Mid-Layer 1 w0.254: v1(154.178,64.135) 154.178,64.77 154.178,112.903 154.94,113.665 154.94,136.017 v1(154.305,136.652)
  Mid-Layer 2 w0.254: CN5.13@31.001,46.081 31.001,60.465 34.671,64.135 v1(154.178,64.135) ; P7.1@149.063,135.255 150.46,136.652 v1(154.305,136.652)
"DCIN_3.3V _RF8": CN5.15 P8.1 R29.2 | length 233.9
  Top Layer w0.254: R29.2@32.719,55.297 32.719,50.466 33.501,49.684 CN5.15@33.501,46.081
  Mid-Layer 1 w0.254: v1(164.719,59.055) 169.037,63.373 169.037,97.917 171.069,99.949 v1(171.069,135.255)
  Mid-Layer 2 w0.254: CN5.15@33.501,46.081 44.951,57.531 163.195,57.531 v1(164.719,59.055) ; P8.1@163.08,135.255 164.223,136.398 169.926,136.398 v1(171.069,135.255)
"DCIN_3.3V _RF9": CN5.17 P9.1 R32.2 | length 263.7
  Top Layer w0.254: R32.2@35.761,55.297 35.761,52.885 36.001,52.645 CN5.17@36.001,46.081
  Mid-Layer 1 w0.254: v1(164.719,57.785) 169.799,62.865 169.799,97.282 171.958,99.441 171.958,169.926 v1(172.212,170.18)
  Mid-Layer 2 w0.254: CN5.17@36.001,46.081 46.562,56.642 163.576,56.642 v1(164.719,57.785)
  Bottom Layer w0.254: v1(172.212,170.18) 174.175,170.18 175.318,171.323 P9.1@177.096,171.323
"DCIN_3.3V _RF10": CN5.19 P10.1 R36.2 | length 277.5
  Top Layer w0.254: CN5.19@38.501,46.081 38.501,48.661 38.802,48.962 R36.2@38.802,55.297
  Mid-Layer 1 w0.254: v1(164.719,56.515) 170.688,62.484 170.688,96.647 172.974,98.933 v1(172.974,170.815)
  Mid-Layer 2 w0.254: CN5.19@38.501,46.081 48.046,55.626 163.83,55.626 v1(164.719,56.515)
  Bottom Layer w0.254: v1(172.974,170.815) 175.387,173.228 189.207,173.228 P10.1@191.112,171.323
"DCIN_3.3V _RF11": CN5.21 P11.1 R39.2 | length 224.9
  Top Layer w0.254: CN5.21@41.001,46.081 41.001,49.002 41.843,49.844 R39.2@41.843,55.297
  Mid-Layer 1 w0.254: v1(164.592,55.118) 171.323,61.849 171.323,96.139 173.482,98.298 173.482,125.222 174.625,126.365 174.625,130.302 ; 174.625,127.635 174.625,130.302 ; P11.1@177.096,135.255 174.625,132.784 174.625,130.302
  Mid-Layer 2 w0.254: CN5.21@41.001,46.081 49.657,54.737 164.211,54.737 v1(164.592,55.118)
"DCIN_3.3V _RF12": CN5.23 P12.1 R43.2 | length 233.3
  Top Layer w0.254: CN5.23@43.501,46.081 43.501,48.581 44.884,49.964 R43.2@44.884,55.297
  Mid-Layer 1 w0.254: v1(172.085,57.658) 172.72,58.293 172.72,90.297 185.42,102.997 185.42,134.874 185.42,135.382 v1(185.928,135.89)
  Mid-Layer 2 w0.254: CN5.23@43.501,46.081 51.014,53.594 168.021,53.594 v1(172.085,57.658) ; v1(185.928,135.89) 186.309,135.89 187.855,134.344 189.125,134.344 189.349,134.568 190.425,134.568 P12.1@191.112,135.255
"DCIN_3.3V _RF13": CN5.25 P13.1 R46.2 | length 376.6
  Top Layer w0.254: CN5.25@46.001,46.081 46.001,49.684 47.926,51.609 R46.2@47.926,55.297
  Mid-Layer 1 w0.254: v1(212.217,171.323) 212.725,170.815 212.725,126.619 213.36,125.984 213.36,109.22 213.106,108.966 213.106,108.331 213.106,106.807 v1(212.725,106.426) ; v1(249.809,60.706) v1(249.809,106.426)
  Mid-Layer 2 w0.254: CN5.25@46.001,46.081 52.625,52.705 168.91,52.705 176.911,60.706 v1(249.809,60.706) v1@249.936,60.706 ; P13.1@205.128,171.323 206.398,170.053 209.677,170.053 210.947,171.323 v1(212.217,171.323) ; v1(212.725,106.426) v1(249.809,106.426)
"DCIN_3.3V _RF14": CN5.27 P14.1 R50.2 | length 362.8
  Top Layer w0.254: CN5.27@48.501,46.081 48.501,49.136 50.967,51.602 R50.2@50.967,55.297
  Mid-Layer 1 w0.254: v1(216.027,107.061) 216.027,111.76 214.503,113.284 214.503,125.349 214.884,125.73 214.884,167.063 P14.1@219.144,171.323 ; v1(248.539,59.436) v1(248.539,107.061)
  Mid-Layer 2 w0.254: CN5.27@48.501,46.081 54.236,51.816 169.545,51.816 177.165,59.436 v1(248.539,59.436) ; v1(216.027,107.061) v1(248.539,107.061)
"DCIN_3.3V _RF15": CN5.29 P15.1 R53.2 | length 333.1
  Top Layer w0.254: CN5.29@51.001,46.081 51.001,48.842 54.008,51.849 R53.2@54.008,55.297
  Mid-Layer 1 w0.254: v1(245.907,137.516) 245.872,137.481 245.872,109.093 246.38,108.585 v1(246.38,58.42)
  Mid-Layer 2 w0.254: CN5.29@51.001,46.081 55.974,51.054 170.561,51.054 177.927,58.42 v1(246.38,58.42) ; P15.1@205.128,135.255 207.668,137.795 231.223,137.795 232.239,138.811 244.611,138.811 v1(245.907,137.516)
"DCIN_3.3V _RF16": CN5.31 P16.1 R57.2 | length 314.5
  Top Layer w0.254: CN5.31@53.501,46.081 53.501,49.183 57.05,52.732 R57.2@57.05,55.297 ; P16.1@219.144,135.255 216.789,132.9 216.789,115.57 v1(221.742,110.617)
  Mid-Layer 1 w0.254: v1(247.015,57.531) v1(247.015,109.601)
  Mid-Layer 2 w0.254: CN5.31@53.501,46.081 57.585,50.165 170.815,50.165 178.181,57.531 v1(247.015,57.531) v1@247.142,57.531 ; v1(221.742,110.617) 225.679,110.617 226.695,109.601 v1(247.015,109.601)
"DCIN_3.3V _RF17": CN5.33 P17.1 R60.2 | length 322.8
  Top Layer w0.254: CN5.33@56.001,46.081 56.001,49.778 60.091,53.868 R60.2@60.091,55.297
  Mid-Layer 1 w0.254: P17.1@233.16,171.323 234.811,172.974 237.109,172.974 238.379,171.704 238.379,50.8 v1(238.506,50.673)
  Mid-Layer 2 w0.254: CN5.33@56.001,46.081 59.196,49.276 237.109,49.276 v1(238.506,50.673)
"DCIN_3.3V _RF18": CN5.35 P18.1 R64.2 | length 322.4
  Top Layer w0.254: CN5.35@58.501,46.081 58.501,49.611 63.132,54.242 R64.2@63.132,55.297
  Mid-Layer 1 w0.254: v1(238.633,48.768) 239.141,49.276 239.141,65.913 239.014,66.04 239.014,169.799 v1(240.919,171.704)
  Mid-Layer 2 w0.254: CN5.35@58.501,46.081 60.807,48.387 238.252,48.387 v1(238.633,48.768) ; 241.173,171.45 241.3,171.323 P18.1@247.177,171.323
"DCIN_3.3V _RF19": CN5.37 P19.1 R67.2 | length 287.4
  Top Layer w0.254: CN5.37@61.001,46.081 61.001,49.063 66.174,54.236 R67.2@66.174,55.297
  Mid-Layer 1 w0.254: v1(238.633,47.244) 239.649,48.26 v1(239.649,137.287)
  Mid-Layer 2 w0.254: CN5.37@61.001,46.081 62.282,47.362 64.032,47.362 64.15,47.244 v1(238.633,47.244) ; P19.1@233.16,135.255 235.192,137.287 v1(239.649,137.287)
"DCIN_3.3V _RF20": CN5.39 P20.1 R70.2 | length 292.6
  Top Layer w0.254: CN5.39@63.501,46.081 63.501,47.499 69.215,53.213 R70.2@69.215,55.297
  Mid-Layer 1 w0.254: v1(247.65,51.181) 247.65,107.442 253.492,113.284 v1(253.492,136.017)
  Mid-Layer 2 w0.254: CN5.39@63.501,46.081 242.55,46.081 v1(247.65,51.181) ; P20.1@247.177,135.255 248.955,137.033 252.476,137.033 v1(253.492,136.017)
"DCIN_3.3V _RF21": CN7.1 P21.1 R72.2 | length 418.9
  Top Layer w0.254: R72.2@11.684,24.944 v1(11.684,23.114) 11.684,20.426 CN7.1@16.001,16.109 ; v1(264.033,40.132) 264.033,48.895 263.259,49.669 263.259,56.122 268.617,61.48 268.617,105.549 272.542,109.474 v1(272.542,172.085)
  Mid-Layer 2 w0.254: v1(11.684,23.114) 12.827,23.114 14.732,25.019 17.018,25.019 26.67,34.671 112.649,34.671 118.11,40.132 v1(264.033,40.132) ; P21.1@261.193,171.323 262.463,170.053 265.811,170.053 267.843,172.085 v1(272.542,172.085)
"DCIN_3.3V _RF22": CN7.3 P22.1 R75.2 | length 413
  Top Layer w0.254: R75.2@14.572,24.944 v1(14.572,23.114) 14.572,21.496 18.501,17.567 CN7.3@18.501,16.109
  Mid-Layer 1 w0.254: v1(268.605,171.069) 268.605,102.616 274.32,96.901 274.32,47.371 v1(270.51,43.561)
  Mid-Layer 2 w0.254: v1(14.572,23.114) 16.256,23.114 27.051,33.909 114.427,33.909 118.999,38.481 265.43,38.481 v1(270.51,43.561) ; v1(268.605,171.069) 271.78,171.069 272.034,171.323 P22.1@275.209,171.323
"DCIN_3.3V _RF23": CN7.5 P23.1 R78.2 | length 378.3
  Top Layer w0.254: R78.2@17.459,24.944 v1(17.459,23.114) 17.459,21.149 21.001,17.607 CN7.5@21.001,16.109
  Mid-Layer 1 w0.254: v1(269.367,135.255) 270.002,134.62 270.002,102.997 274.955,98.044 274.955,46.355 v1(271.018,42.418)
  Mid-Layer 2 w0.254: v1(17.459,23.114) 18.542,23.114 28.321,32.893 115.316,32.893 120.015,37.592 266.192,37.592 v1(271.018,42.418) ; P23.1@261.193,135.255 262.971,137.033 267.589,137.033 v1(269.367,135.255)
"DCIN_3.3V _RF24": CN7.7 P24.1 R82.2 | length 378.6
  Top Layer w0.254: R82.2@20.347,24.944 v1(20.347,23.114) 20.347,20.928 23.501,17.774 CN7.7@23.501,16.109
  Mid-Layer 1 w0.254: v1(278.384,36.703) 278.384,104.775 281.432,107.823 281.432,133.096 v1(280.416,134.112)
  Mid-Layer 2 w0.254: v1(20.347,23.114) 29.491,32.258 117.221,32.258 121.666,36.703 v1(278.384,36.703) ; P24.1@275.209,135.255 276.352,134.112 v1(280.416,134.112)
GND_RF1: CN1.1 CN2.2 P1.13 P1.14 P1.15 R1.1 R2.1 U3.50 | length 342.1
  Top Layer w0.254: P1.15@121.031,153.543 P1.13@121.031,156.083 ; R1.1@179.451,90.805 177.038,90.805 176.276,90.043 v1(176.276,88.011) 176.276,79.883 178.562,77.597 R2.1@178.562,64.262 177.292,64.262 176.403,63.373 176.403,38.881 CN2.2@183.895,31.389 CN1.1@183.895,12.66
  Mid-Layer 1 w0.254: v1(110.744,117.983) 111.379,117.983 114.046,115.316 v1(114.046,80.899)
  Mid-Layer 2 w0.254: U3.50@14.859,110.617 16.09,111.848 16.09,115.658 18.415,117.983 v1(110.744,117.983) ; v1(114.046,80.899) 150.876,80.899 157.988,88.011 v1(176.276,88.011) ; v1(115.443,153.543) P1.15@121.031,153.543 ; P1.13@121.031,156.083 P1.14@123.571,156.083
  Bottom Layer w0.254: v1(110.744,117.983) 114.427,117.983 115.443,118.999 v1(115.443,153.543)
GND_RF2: CN1.3 CN2.4 P2.13 P2.14 P2.15 R3.1 R6.1 U3.44 | length 352.3
  Top Layer w0.254: P2.15@135.047,153.543 P2.13@135.047,156.083 ; R3.1@182.579,90.805 v1(181.102,89.328) 181.102,82.55 182.626,81.026 184.658,81.026 185.166,80.518 185.166,74.168 181.811,70.813 R6.1@181.811,64.262 180.594,64.262 179.959,63.627 179.959,59.817 183.388,56.388 184.531,56.388 185.166,55.753 185.166,32.618 CN2.4@186.395,31.389 CN1.3@186.395,12.66
  Mid-Layer 1 w0.254: v1(128.397,153.416) 128.397,83.566 v1(129.921,82.042)
  Mid-Layer 2 w0.254: U3.44@22.479,110.617 23.114,109.982 23.114,97.663 31.115,89.662 34.807,89.662 42.427,82.042 v1(129.921,82.042) 148.336,82.042 155.622,89.328 v1(181.102,89.328) ; v1(128.397,153.416) 134.92,153.416 P2.15@135.047,153.543 ; P2.13@135.047,156.083 P2.14@137.587,156.083
GND_RF3: CN1.5 CN2.6 P3.13 P3.14 P3.15 R7.1 R9.1 U3.38 | length 302.2
  Top Layer w0.254: v1(116.84,85.471) 116.84,107.569 121.031,111.76 P3.15@121.031,117.475 P3.13@121.031,120.015 ; v1(185.707,92.296) R7.1@185.707,90.805 184.15,89.248 184.15,84.284 186.795,81.639 ; 186.519,81.915 186.795,81.639 ; CN1.5@188.895,12.66 CN2.6@188.895,31.389 187.579,32.705 187.579,55.88 183.261,60.198 183.261,64.008 183.515,64.262 R9.1@185.059,64.262 185.059,69.743 187.706,72.39 187.706,80.728 186.795,81.639
  Mid-Layer 2 w0.254: U3.38@30.099,110.617 30.099,99.06 36.449,92.71 39.878,92.71 47.752,84.836 116.205,84.836 v1(116.84,85.471) 145.161,85.471 151.986,92.296 v1(185.707,92.296) ; P3.13@121.031,120.015 P3.14@123.571,120.015
GND_RF4: CN1.7 CN2.8 P4.13 P4.14 P4.15 R10.1 R13.1 U3.32 | length 284.4
  Top Layer w0.254: v1(188.836,92.824) R10.1@188.836,90.805 187.325,89.294 187.325,84.328 190.252,81.401 190.252,71.507 188.308,69.563 R13.1@188.308,64.262 187.198,64.262 186.817,63.881 186.817,59.817 190.119,56.515 190.119,32.665 CN2.8@191.395,31.389 CN1.7@191.395,12.66
  Mid-Layer 1 w0.254: P4.13@135.047,120.015 P4.15@135.047,117.475 135.047,115.27 136.271,114.046 v1(136.271,90.551)
  Mid-Layer 2 w0.254: U3.32@37.719,110.617 37.719,104.394 53.34,88.773 101.854,88.773 103.632,90.551 v1(136.271,90.551) 146.05,90.551 148.844,93.345 188.314,93.345 v1(188.836,92.824) ; P4.13@135.047,120.015 P4.14@137.587,120.015
GND_RF5: CN1.9 CN2.10 P5.13 P5.14 P5.15 R14.1 R16.1 U3.24 | length 312.4
  Top Layer w0.254: P5.15@149.063,153.543 P5.13@149.063,156.083 ; v1(191.964,93.853) R14.1@191.964,90.805 190.373,89.214 190.373,85.344 192.532,83.185 192.532,79.714 192.538,79.707 192.538,70.07 191.556,69.088 R16.1@191.556,64.262 190.373,64.262 189.865,63.754 189.865,59.817 192.538,57.144 192.538,32.746 CN2.10@193.895,31.389 CN1.9@193.895,12.66
  Mid-Layer 1 w0.254: v1(142.621,153.416) 142.621,129.667 143.129,129.159 v1(143.129,93.853)
  Mid-Layer 2 w0.254: U3.24@47.879,110.617 47.879,104.14 58.166,93.853 v1(143.129,93.853) v1(191.964,93.853) ; v1(142.621,153.416) 148.936,153.416 P5.15@149.063,153.543 ; P5.13@149.063,156.083 P5.14@151.603,156.083
GND_RF6: CN1.11 CN2.12 P6.13 P6.14 P6.15 R17.1 R20.1 U3.18 | length 300.1
  Top Layer w0.254: P6.15@163.08,153.543 163.08,151.245 168.275,146.05 168.275,116.078 165.608,113.411 v1(165.608,98.044) ; v1(194.183,99.441) 195.092,98.532 R17.1@195.092,90.805 193.548,89.261 193.548,85.09 195.199,83.439 195.199,75.057 194.805,74.663 R20.1@194.805,64.262 193.929,64.262 193.421,63.754 193.421,58.547 195.199,56.769 195.199,32.585 CN2.12@196.395,31.389 CN1.11@196.395,12.66
  Mid-Layer 1 w0.254: P6.15@163.08,153.543 P6.13@163.08,156.083
  Mid-Layer 2 w0.254: U3.18@55.499,110.617 67.056,99.06 98.679,99.06 100.711,97.028 143.383,97.028 144.399,98.044 v1(165.608,98.044) 192.786,98.044 v1(194.183,99.441) ; P6.13@163.08,156.083 P6.14@165.62,156.083
GND_RF7: CN1.13 CN2.14 P7.13 P7.14 P7.15 R21.1 R23.1 U3.12 | length 253.1
  Top Layer w0.254: v1(148.336,104.521) 148.336,109.728 149.063,110.455 P7.15@149.063,117.475 P7.13@149.063,120.015 ; v1(198.22,105.129) R21.1@198.22,90.805 196.596,89.181 196.596,85.471 197.612,84.455 197.612,72.771 198.053,72.33 R23.1@198.053,64.262 196.723,64.262 196.469,64.008 196.469,57.889 197.739,56.619 197.739,32.545 CN2.14@198.895,31.389 CN1.13@198.895,12.66
  Mid-Layer 2 w0.254: U3.12@63.119,110.617 63.119,109.474 68.072,104.521 v1(148.336,104.521) 148.944,105.129 v1(198.22,105.129) ; P7.13@149.063,120.015 P7.14@151.603,120.015
GND_RF8: CN1.15 CN2.16 P8.13 P8.14 P8.15 R24.1 R27.1 U3.6 | length 243.2
  Top Layer w0.254: P8.13@163.08,120.015 P8.15@163.08,117.475 163.08,114.161 163.576,113.665 v1(163.576,107.569) ; v1(200.279,106.172) 201.348,105.103 R24.1@201.348,90.805 200.067,89.524 200.067,72.729 201.302,71.494 R27.1@201.302,64.262 201.041,64.262 199.517,62.738 199.517,58.166 200.152,57.531 200.152,32.632 CN2.16@201.395,31.389 CN1.15@201.395,12.66
  Mid-Layer 2 w0.254: U3.6@70.739,110.617 73.787,107.569 v1(163.576,107.569) 164.973,106.172 v1(200.279,106.172) ; P8.13@163.08,120.015 P8.14@165.62,120.015
GND_RF9: CN1.17 CN2.18 P9.13 P9.14 P9.15 R28.1 R30.1 U2.50 | length 363.5
  Top Layer w0.254: v1(198.247,147.32) 198.247,109.855 204.477,103.625 R28.1@204.477,90.805 205.994,89.288 205.994,85.09 205.232,84.328 205.232,75.184 204.55,74.502 v1(204.55,66.294) R30.1@204.55,64.262 ; CN1.17@203.895,12.66 CN2.18@203.895,31.389
  Mid-Layer 1 w0.254: v1(173.609,126.492) 173.609,143.51 177.096,146.997 P9.15@177.096,153.543 P9.13@177.096,156.083
  Mid-Layer 2 w0.254: U2.50@14.859,135.255 28.829,121.285 112.522,121.285 117.729,126.492 v1(173.609,126.492) ; P9.13@177.096,156.083 P9.14@179.636,156.083 ; v1(177.165,147.32) 177.673,147.32 ; v1@177.292,147.32 177.673,147.32 ; v1(198.247,147.32) 177.673,147.32
  Bottom Layer w0.254: CN2.18@203.895,31.389 202.565,32.719 202.565,64.69 204.193,66.317
GND_RF10: CN1.19 CN2.20 P10.13 P10.14 P10.15 R31.1 R34.1 U2.44 | length 344.5
  Top Layer w0.254: P10.14@193.652,156.083 199.263,150.472 199.263,111.252 207.605,102.91 R31.1@207.605,90.805 209.169,89.241 209.169,83.058 207.752,81.641 207.752,65.933 v1(207.799,65.886) R34.1@207.799,64.262 ; CN1.19@206.395,12.66 CN2.20@206.395,31.389
  Mid-Layer 1 w0.254: P10.15@191.112,153.543 P10.13@191.112,156.083
  Mid-Layer 2 w0.254: v1(110.871,114.554) 133.604,114.554 134.366,115.316 v1(199.263,115.316) ; P10.13@191.112,156.083 P10.14@193.652,156.083
  Bottom Layer w0.254: U2.44@22.479,135.255 43.18,114.554 v1(110.871,114.554) ; CN2.20@206.395,31.389 205.105,32.679 205.105,63.246 v1@207.772,65.913